# Altium PCB ina_extension_led_pcb.PcbDoc
Units mm, origin at the board's own origin, x right, y up, seen from the top; angles counter-clockwise.
Board outline 90 x 8 mm, 2 copper layers (Top Layer, Bottom Layer); 13 components, 24 nets, 88 pads, 28 vias.
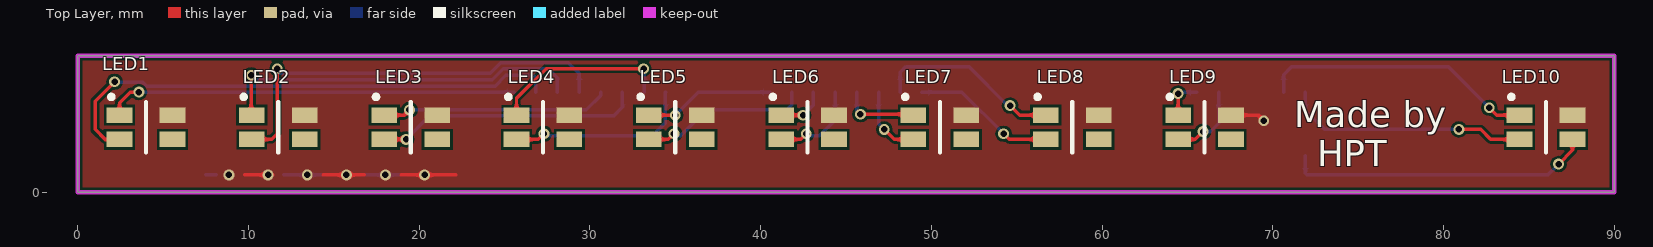
[diagram p0: Top Layer view]
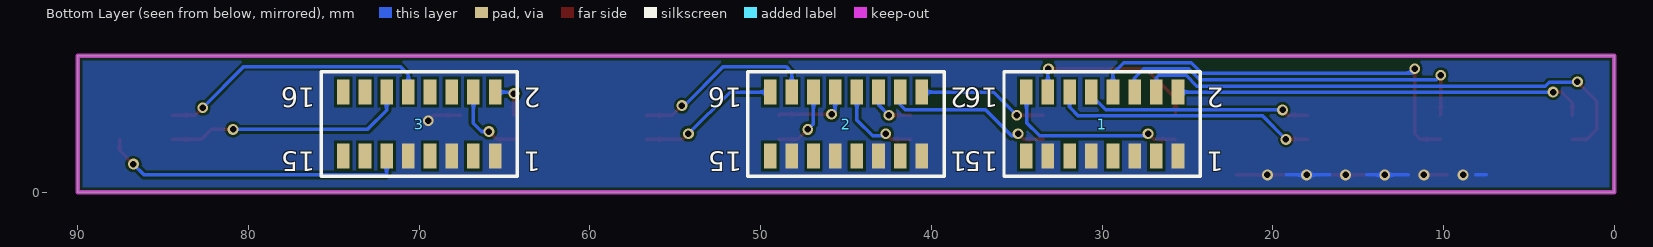
[diagram p1: Bottom Layer view, seen from below]
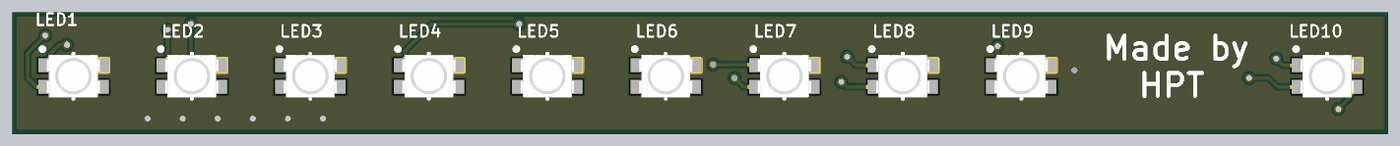
[diagram p2: 3D render of the assembled board from above, using the file's embedded part models]
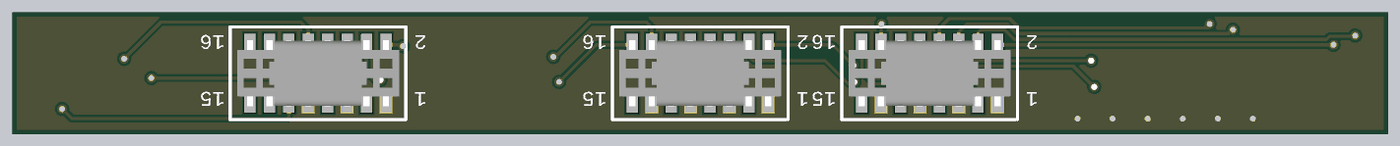
[diagram p3: 3D render of the assembled board from below, using the file's embedded part models]

## Layer stack, top to bottom
Top Solder: solder mask 0.0102, Solder Resist, Dk 3.5
Top Layer: signal copper 0.0356
Dielectric 1: dielectric 0.32, FR-4, Dk 4.8
Bottom Layer: signal copper 0.0356
Bottom Solder: solder mask 0.0102, Solder Resist, Dk 3.5

## Board outline
0,0 0,8 90,8 90,0

## Design rules (kind name [scope] priority, off if disabled: settings)
Clearance [All] p1: gap=0.152
PlaneConnect [All] p1: planeconnectstyle=Direct reliefexpansion=0.508 reliefentries=4 reliefconductorwidth=0.254 reliefairgap=0.254
PolygonConnect [All] p1: connectstyle=Direct reliefconductorwidth=0.254 reliefentries=4 polygonreliefangle="90 Angle" airgapwidth=0.254
RoutingVias [All] p1: holewidth=0.381 width=0.635 viastyle="Through Hole" minholewidth=0.381 minwidth=0.635 maxholewidth=0.711 maxwidth=1.27
SolderMaskExpansion [All] p1: expansion=0.102
Width [All] p1: maxlimit=0.254 minlimit=0.203 preferedwidth=0.203
29 further rules are at their usual default settings.

## Components (designator, comment, footprint, x,y, rotation, side; value= is the part's Value field where it differs from the comment)
1 "SAMTEC-CLP-108-02-X-D-BEJ" SAMTEC-CLP-108-02-X-D-BE 30,4 r0 bottom locked
2 "SAMTEC-CLP-108-02-X-D-BEJ" SAMTEC-CLP-108-02-X-D-BE 45,4 r0 bottom locked
3 "SAMTEC-CLP-108-02-X-D-BEJ" SAMTEC-CLP-108-02-X-D-BE 70,4 r0 bottom locked
LED1 "150141M173100" "LED RGB 3528" 4,3.81 r0 top
LED2 "150141M173100" "LED RGB 3528" 11.75,3.81 r0 top
LED3 "150141M173100" "LED RGB 3528" 19.5,3.81 r0 top
LED4 "150141M173100" "LED RGB 3528" 27.25,3.81 r0 top
LED5 "150141M173100" "LED RGB 3528" 35,3.81 r0 top
LED6 "150141M173100" "LED RGB 3528" 42.75,3.81 r0 top
LED7 "150141M173100" "LED RGB 3528" 50.5,3.81 r0 top
LED8 "150141M173100" "LED RGB 3528" 58.25,3.81 r0 top
LED9 "150141M173100" "LED RGB 3528" 66,3.81 r0 top
LED10 "150141M173100" "LED RGB 3528" 86,3.81 r0 top

## Footprints (in the part's own frame and the unit in brackets; to place one, negate y for a bottom-side part, rotate by r counter-clockwise, add the part's x,y. Pads: shape width x height; smd on the part's side, far side on the other; paste and mask are expansions set on the pad)
"LED RGB 3528" [mm] "Chip LED, 4-Leads, Body 2.8x3.5mm (max), Pitch 1.42mm, IPC Medium Density"
  rect 1.5x0.9 smd: 1(1.55,0.707) 2(1.55,-0.71) 3(-1.55,0.707) 4(-1.55,-0.707)
  silkscreen extent -2.15,-1.5 0.03,1.9, body extent -1.75,-1.4 1.75,1.4, height 1.87
SAMTEC-CLP-108-02-X-D-BE [mil]
  rect 29.13x57.87 smd mask+0: 1(-175,73.5) 2(-175,-73.5) 3(-125,73.5) 4(-125,-73.5) 5(-75,73.5) 6(-75,-73.5) 7(-25,73.5) 8(-25,-73.5) 9(25,73.5) 10(25,-73.5) 11(75,73.5) 12(75,-73.5) 13(125,73.5) 14(125,-73.5) 15(175,73.5) 16(175,-73.5)
  silkscreen extent -226,-120 226,120, body extent -208,-85 209,85, height 100

## Part data
LED1 LED2 LED3 LED4 LED5 LED6 LED7 LED8 LED9 LED10: library part "LED RGB SMD", "SMD Full-Color Top LED, WL-SFTW, Red & Green & Blue"

## Via types
v1: diameter 0.635, hole 0.381, Top Layer to Bottom Layer, tented both sides, 28 vias

## Nets (pads, with @x,y where several pads share a name; then routed paths per layer and width w, separated by ;. In a path a pad name is that pad's centre, name@x,y a point inside that pad or via, vN(x,y) a via of type N, cw(c..) or ccw(c..) an arc to the next point about the centre after c; other vN are vias at no path point)
3V3: 1.1 1.5 1.9 1.13 2.1 2.5 2.9 2.13 3.1 3.5 3.9 LED1.1 LED2.1 LED3.1 LED4.1 LED5.1 LED6.1 LED7.1 LED8.1 LED9.1 LED10.1 | length 14.9
  Top Layer w0.203: 9.786,1.016 v1@11.437,1.016 ; 14.372,1.016 16.785,1.016 ; 18.958,1.016 22.133,1.016 ; LED9.1 69.143,4.517 v1(69.469,4.191)
  Bottom Layer w0.203: 7.493,1.016 8.128,1.016 ; 12.079,1.016 14.492,1.016 ; 16.665,1.016 19.205,1.016
  other v1: 8.855,1.016 11.148,1.016 13.441,1.016 15.734,1.016 18.027,1.016 20.32,1.016
LED_B: 3.11 LED10.2 | length 17.9
  Top Layer w0.203: v1(86.741,1.651) 87.55,2.46 LED10.2
  Bottom Layer w0.203: 3.11 71.905,1.12 72.009,1.016 86.106,1.016 v1(86.741,1.651)
LED_G: 3.12 LED10.4 | length 14.3
  Top Layer w0.203: v1(80.899,3.683) 82.169,3.683 82.749,3.103 LED10.4
  Bottom Layer w0.203: 3.12 71.905,4.803 73.025,3.683 v1(80.899,3.683)
LED_R: 3.10 LED10.3 | length 16.2
  Top Layer w0.203: v1(82.677,4.953) 83.113,4.517 LED10.3
  Bottom Layer w0.203: 3.10 70.635,6.881 71.12,7.366 80.264,7.366 v1(82.677,4.953)
M1_OFF: 1.2 LED1.3 | length 24.1
  Top Layer w0.203: LED1.3 2.45,5.244 3.073,5.867 v1(3.581,5.867)
  Bottom Layer w0.203: v1(3.581,5.867) 1.2
M1_ON: 1.4 LED1.4 | length 30.9
  Top Layer w0.203: v1(2.159,6.477) 1.016,5.334 1.016,3.683 1.596,3.103 LED1.4
  Bottom Layer w0.203: v1(2.159,6.477) 2.198,6.438 3.818,6.438 4.034,6.222 24.446,6.222 25.08,6.856 26.672,6.856 26.825,6.703 1.4
M2_OFF: 1.6 LED2.3 | length 21.7
  Top Layer w0.203: v1(10.16,6.858) 10.16,4.557 LED2.3
  Bottom Layer w0.203: v1(10.16,6.858) 10.414,6.604 24.283,6.604 24.918,7.239 27.559,7.239 28.095,6.703 1.6
M2_ON: 1.8 LED2.4 | length 24.9
  Top Layer w0.203: LED2.4 11.358,3.103 11.684,3.429 v1(11.684,7.239)
  Bottom Layer w0.203: v1(11.684,7.239) 11.684,7.112 11.811,6.985 24.161,6.985 24.771,7.595 28.727,7.595 29.365,6.957 1.8
M3_OFF: 1.10 LED3.3 | length 13.4
  Top Layer w0.203: LED3.3 19.122,4.517 v1(19.431,4.826)
  Bottom Layer w0.203: v1(19.431,4.826) 29.788,4.826 30.635,5.673 1.10
M3_ON: 1.12 LED3.4 | length 15.6
  Top Layer w0.203: LED3.4 v1(19.232,3.103)
  Bottom Layer w0.203: v1(19.232,3.103) 20.599,4.47 31.394,4.47 31.905,4.981 1.12
M4_OFF: 1.14 LED4.3 | length 10.5
  Top Layer w0.203: LED4.3 25.7,5.507 27.432,7.239 v1(33.147,7.239)
  Bottom Layer w0.203: v1(33.147,7.239) 33.175,7.211 1.14
M4_ON: 1.16 LED4.4 | length 11
  Top Layer w0.203: LED4.4 26.979,3.103 v1(27.305,3.429)
  Bottom Layer w0.203: v1(27.305,3.429) 27.432,3.302 33.655,3.302 34.426,4.073 34.426,5.848 1.16
M5_OFF: 2.2 LED5.3 | length 7.7
  Top Layer w0.203: LED5.3 v1(34.997,4.517)
  Bottom Layer w0.203: v1(34.997,4.517) 36.347,5.867 2.2
M5_ON: 2.4 LED5.4 | length 10.1
  Top Layer w0.203: LED5.4 34.599,3.103 v1(34.925,3.429)
  Bottom Layer w0.203: v1(34.925,3.429) 35.052,3.302 35.306,3.302 36.83,4.826 41.529,4.826 41.825,5.122 2.4
M6_OFF: 2.6 LED6.3 | length 2.9
  Top Layer w0.203: LED6.3 v1(42.49,4.517)
  Bottom Layer w0.203: v1(42.49,4.517) 43.095,5.122 2.6
M6_ON: 2.8 LED6.4 | length 5.4
  Top Layer w0.203: LED6.4 42.346,3.103 v1(42.672,3.429)
  Bottom Layer w0.203: v1(42.672,3.429) 42.799,3.302 43.434,3.302 44.365,4.233 2.8
M7_OFF: 2.10 LED7.3 | length 4.5
  Top Layer w0.203: v1(45.847,4.572) 48.895,4.572 LED7.3
  Bottom Layer w0.203: 2.10 45.635,4.784 v1(45.847,4.572)
M7_ON: 2.12 LED7.4 | length 4.3
  Top Layer w0.203: v1(47.244,3.683) 47.824,3.103 LED7.4
  Bottom Layer w0.203: 2.12 46.905,4.022 v1(47.244,3.683)
M8_OFF: 2.14 LED8.3 | length 11
  Top Layer w0.203: v1(54.61,5.08) 55.173,4.517 LED8.3
  Bottom Layer w0.203: 2.14 48.175,7.027 48.514,7.366 52.197,7.366 54.483,5.08 v1(54.61,5.08)
M8_ON: 2.16 LED8.4 | length 8.4
  Top Layer w0.203: v1(54.229,3.429) 54.555,3.103 LED8.4
  Bottom Layer w0.203: 2.16 51.791,5.867 v1(54.229,3.429)
M9_OFF: 3.2 LED9.3 | length 2.4
  Top Layer w0.203: LED9.3 v1(64.45,5.781)
  Bottom Layer w0.203: v1(64.45,5.781) 64.536,5.867 3.2
M9_ON: 3.4 LED9.4 | length 4.6
  Top Layer w0.203: LED9.4 65.46,3.103 v1(65.913,3.556)
  Bottom Layer w0.203: v1(65.913,3.556) 66.34,3.556 66.825,4.041 3.4
M10_OFF: 3.6
M10_ON: 3.8
pads on no net: 1.3 1.7 1.11 1.15 2.3 2.7 2.11 2.15 3.3 3.7 3.13 3.14 3.15 3.16 LED1.2 LED2.2 LED3.2 LED4.2 LED5.2 LED6.2 LED7.2 LED8.2 LED9.2

## Polygon pours and split planes (outlines as drawn)
3V3 on Top Layer "Top Layer-No Net" (solid, remove dead copper, pour order 0): 0,8 0,0 90,0 90,8
3V3 on Bottom Layer "Top Layer-No Net" (solid, remove dead copper, pour order 2): 0,8 0,0 90,0 90,8

## Keep-outs
Keep-Out Layer:
  the board outline again, w0.254

## Silkscreen, mask and mechanical layers (free items; w line width, h text height)
Top Overlay:
  text "Made by /   HPT" at 71.247,1.511 h1.52

## Text inside footprints (layer, text, board x,y; h text height)
1: Mechanical 30 "3.734" at 19.053,4.127 h0.39 r180; Mechanical 30 "3.048" at 21.212,4.127 h0.39 r180; Mechanical 30 "1.270" at 22.926,8.128 h0.39 r180; Mechanical 30 "10.592" at 29.2,9.867 h0.39 r180; Mechanical 30 "8.890" at 29.34,8.826 h0.39 r180; Mechanical 3 "2" at 22.884,6.502 h1.97 r180; Mechanical 3 "16" at 36.087,6.502 h1.97 r180; Mechanical 3 "15" at 36.087,2.768 h1.97 r180; Bottom Overlay "15" at 36.087,2.768 h1.97 r180; Bottom Overlay "16" at 36.087,6.502 h1.97 r180; Bottom Overlay "2" at 22.884,6.502 h1.97 r180
2: Mechanical 30 "3.734" at 34.053,4.127 h0.39 r180; Mechanical 30 "3.048" at 36.212,4.127 h0.39 r180; Mechanical 30 "1.270" at 37.926,8.128 h0.39 r180; Mechanical 30 "10.592" at 44.2,9.867 h0.39 r180; Mechanical 30 "8.890" at 44.34,8.826 h0.39 r180; Mechanical 3 "1" at 37.884,2.768 h1.97 r180; Mechanical 3 "16" at 51.087,6.502 h1.97 r180; Mechanical 3 "15" at 51.087,2.768 h1.97 r180; Bottom Overlay "15" at 51.087,2.768 h1.97 r180; Bottom Overlay "16" at 51.087,6.502 h1.97 r180; Bottom Overlay "1" at 37.884,2.768 h1.97 r180
3: Mechanical 30 "3.734" at 59.053,4.127 h0.39 r180; Mechanical 30 "3.048" at 61.212,4.127 h0.39 r180; Mechanical 30 "1.270" at 62.926,8.128 h0.39 r180; Mechanical 30 "10.592" at 69.2,9.867 h0.39 r180; Mechanical 30 "8.890" at 69.34,8.826 h0.39 r180; Mechanical 3 "2" at 62.884,6.502 h1.97 r180; Mechanical 3 "1" at 62.884,2.768 h1.97 r180; Mechanical 3 "16" at 76.087,6.502 h1.97 r180; Mechanical 3 "15" at 76.087,2.768 h1.97 r180; Bottom Overlay "15" at 76.087,2.768 h1.97 r180; Bottom Overlay "16" at 76.087,6.502 h1.97 r180; Bottom Overlay "1" at 62.884,2.768 h1.97 r180; Bottom Overlay "2" at 62.884,6.502 h1.97 r180